# Altium PCB msb.PcbDoc
Units mm, origin at the board's own origin, x right, y up, seen from the top; angles counter-clockwise.
Board outline 60 x 40 mm, 4 copper layers (Top Layer, Power plane, Ground plane, Bottom Layer), stack 1.673 mm thick; 50 components, 51 nets, 251 pads, 118 vias.
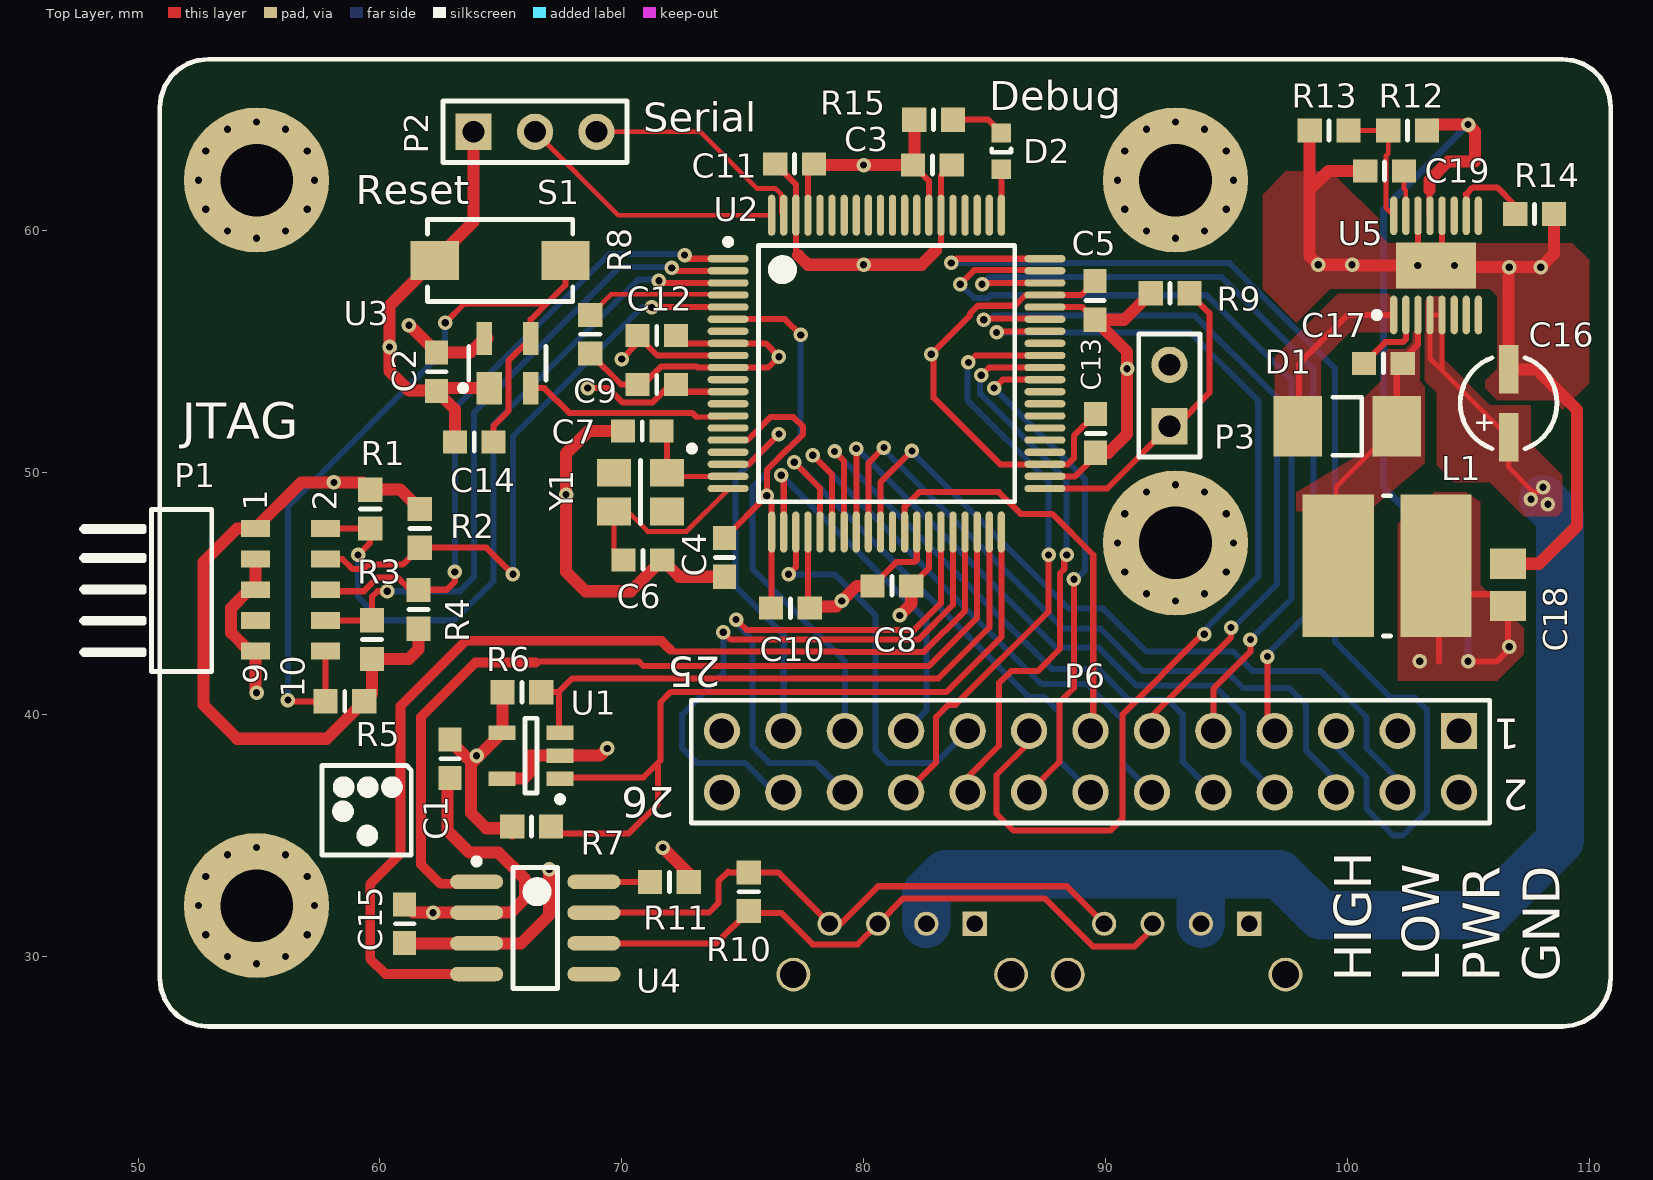
[diagram p0: Top Layer view]
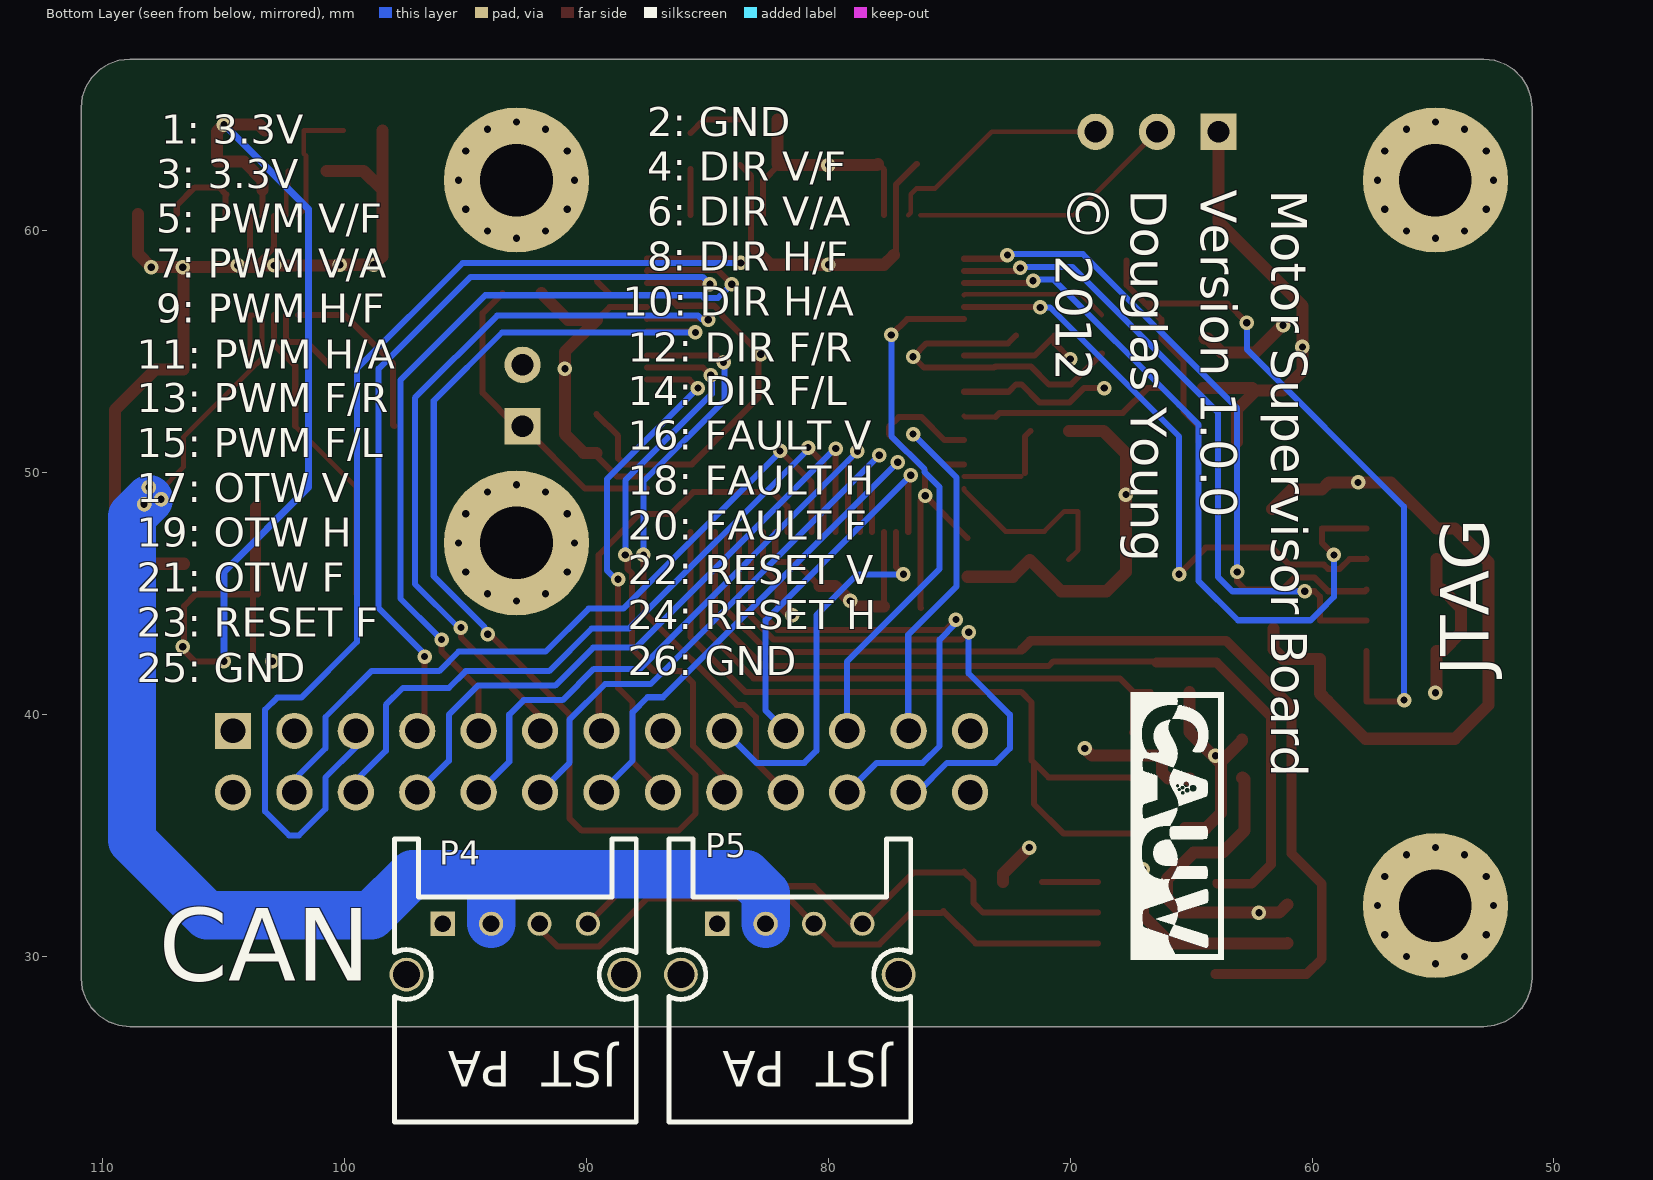
[diagram p1: Bottom Layer view, seen from below]
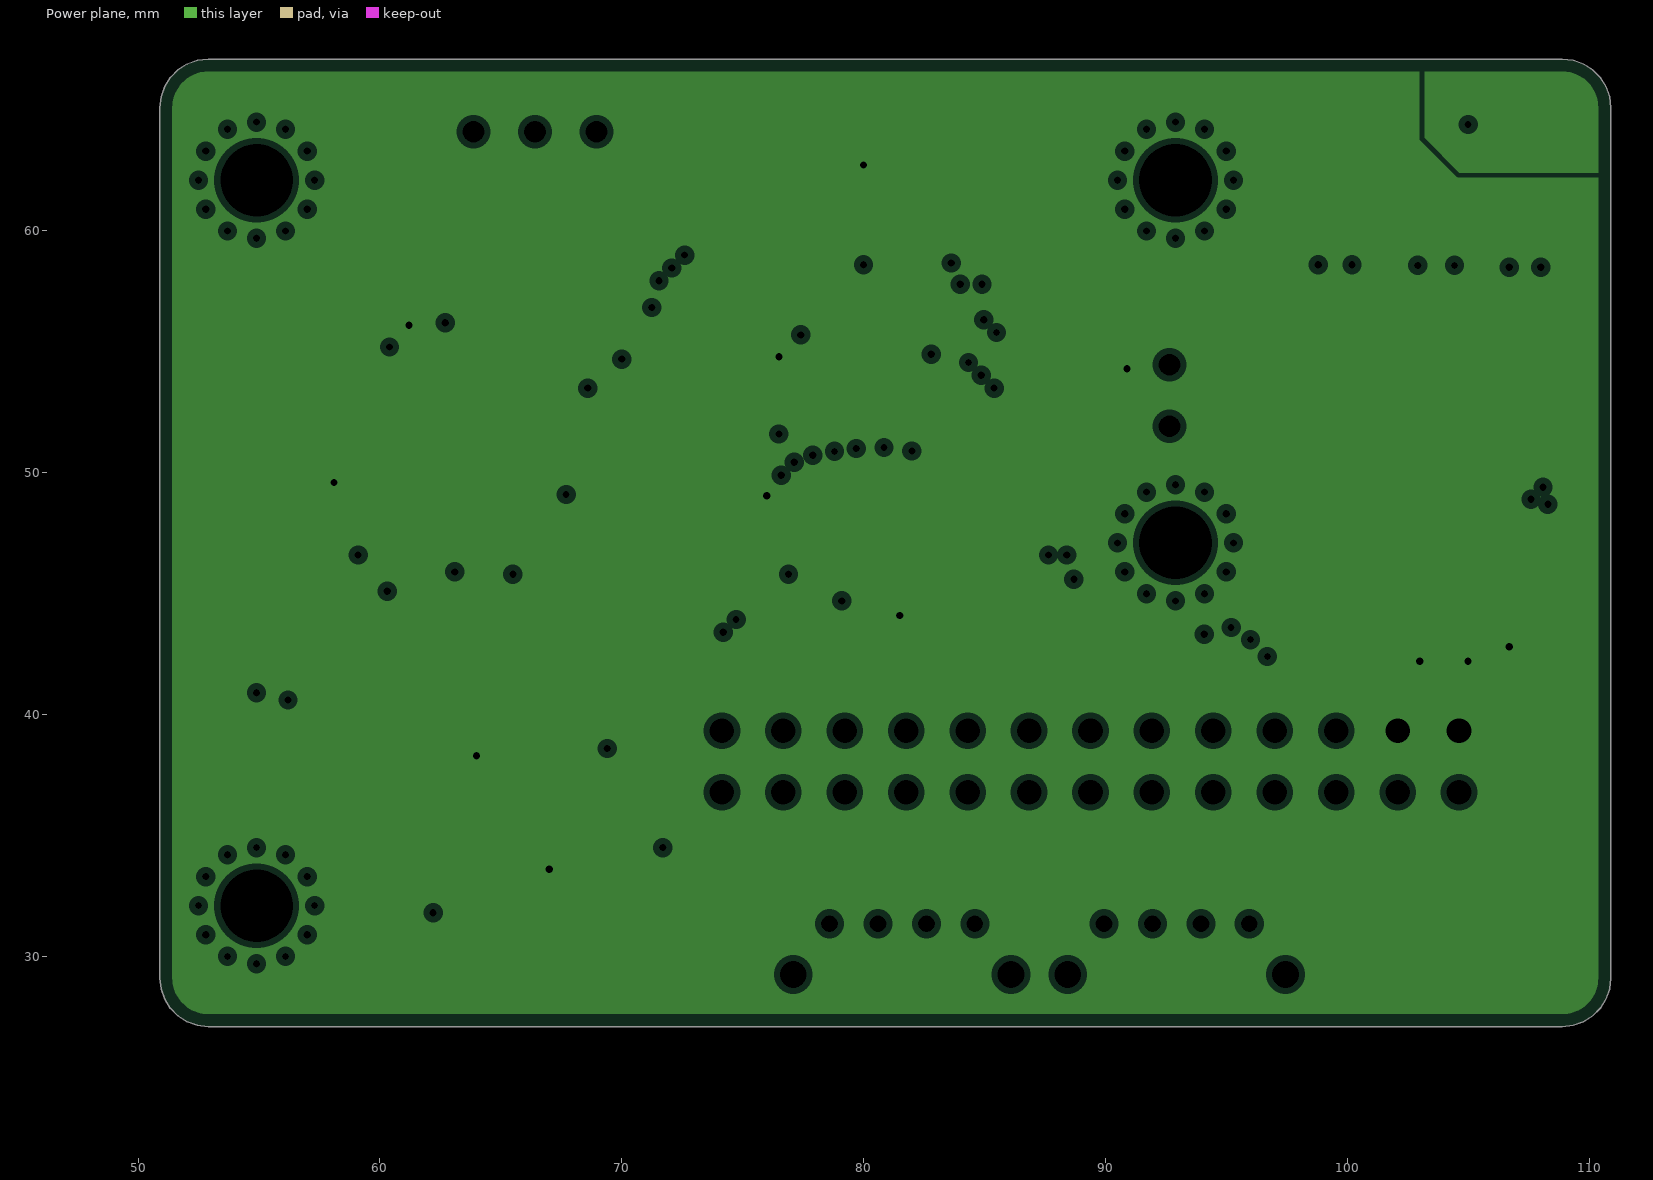
[diagram p2: Power plane, clearances drawn from the general rule]
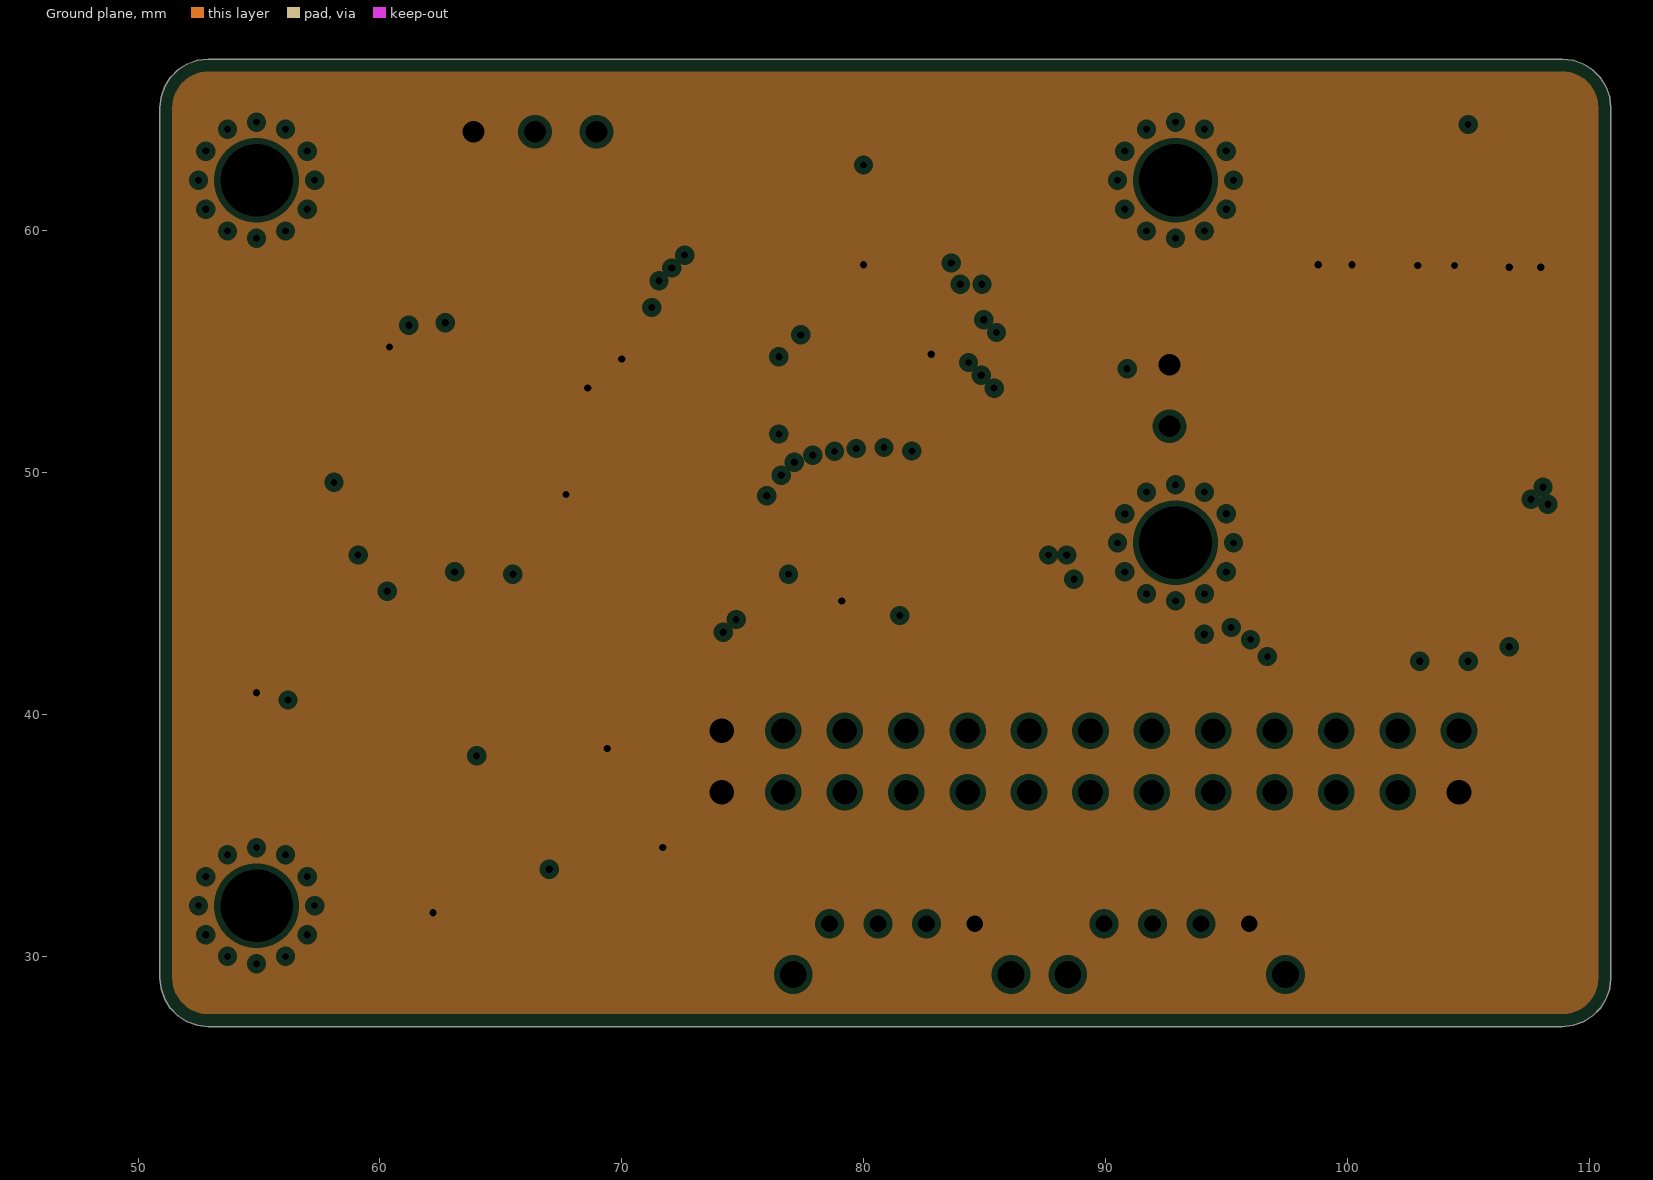
[diagram p3: Ground plane, clearances drawn from the general rule]

## Layer stack, top to bottom
Top Layer: signal copper 0.0356
Dielectric: core 0.22, FR-4, Dk 4.8
Power plane: plane copper 0.0356, net +3.3
Dielectric: prepreg 0.9906, FR-4, Dk 4.8
Ground plane: plane copper 0.0356, net GND
Dielectric: core 0.32, FR-4, Dk 4.8
Bottom Layer: signal copper 0.0356

## Board outline
108.9,27.1 52.9,27.1 52.455,27.15 52.032,27.298 51.653,27.536 51.336,27.853 51.098,28.232 50.95,28.655 50.9,29.1 50.9,65.1 50.95,65.545 51.098,65.968 51.336,66.347 51.653,66.664 52.032,66.902 52.455,67.05 52.9,67.1 108.9,67.1 109.345,67.05 109.768,66.902 110.147,66.664 110.464,66.347 110.702,65.968 110.85,65.545 110.9,65.1 110.9,29.1 110.85,28.655 110.702,28.232 110.464,27.853 110.147,27.536 109.768,27.298 109.345,27.15

## Design rules (kind name [scope] priority, off if disabled: settings)
AssemblyTestPointUsage [All] p1 off:
Clearance [All] p1: gap=0.15
ComponentClearance [All] p1: gap=0.25 collisioncheckmode=3 verticalgap=0.25 showdistances=FALSE
FabricationTestPointUsage [All] p1 off: valid=0 allowmultiple=FALSE
HoleSize [All] p1: absolutevalues=TRUE maxlimit=10 minlimit=0.2 maxpercent=80.000 minpercent=20.000
HoleToHoleClearance [All] p1: gap=0.25 allowstackedmicrovias=TRUE
MinimumAnnularRing [All] p1: minimumring=0.15
MinimumSolderMaskSliver [All] p1: minsoldermaskwidth=0.125
PlaneClearance [All] p1: clearance=0.25
PlaneConnect [All] p1: planeconnectstyle=Relief reliefexpansion=0.5 reliefentries=4 reliefconductorwidth=0.25 reliefairgap=0.25
PolygonConnect [All] p1: connectstyle=Direct reliefconductorwidth=0.25 reliefentries=4 polygonreliefangle="90 Angle"
RoutingVias [All] p1: holewidth=0.3 width=0.6 viastyle="Through Hole" minholewidth=0.3 minwidth=0.6 maxholewidth=0.4 maxwidth=0.8
SilkToSilkClearance [All] p1: silktosilkclearance=0.25
SilkscreenOverComponentPads [All] p1: minsilkscreentomaskgap=0.125
SolderMaskExpansion ViaCovering [(IsVia)] p1: expansion=-10
SolderMaskExpansion [All] p2: expansion=0.125
Width "CAN Power" [InNet('CAN_POWER')] p1: maxlimit=10 minlimit=0.2 preferedwidth=2
Width Power [InNetClass('Power')] p2: maxlimit=10 minlimit=0.25 preferedwidth=0.5
Width General [All] p3: maxlimit=10 minlimit=0.2 preferedwidth=0.25
18 further rules are at their usual default settings.

## Classes and differential pairs
net class Power: +3.3 CAN_POWER GND
component class "U_Reset Supervisor": C1.10 C2.10 C13 C14 U1.10 U3
component class U_motor_output: J? P6
component class U_mcu_power: C1.8 C2 C2.8 C3 C3.8 C4 C4.8 C5 C5.8 C6 C6.8 C7 C7.8 C8 C8.8 C9 C9.8 C10 C10.8 C11 C11.8 C12 P1.8 P3 R1.8 R2.8 R8 R9 S1 S1.8 Y1 Y1.8
component class "U_I2C 3": R1.6 R2.6 R6 R7
component class "U_ARM JTAG Header": P1 P1.2 R1 R1.2 R2 R2.2 R3 R3.2 R4 R4.2 R5 R5.2
component class "U_1KB I2C EEPROM": C1 C1.1 U1 U1.1
component class U_3: C16 C17 C18 C19 D1 L1 R12 R13 R14 U5
component class "U_CAN Termination Connector (JST)": P4 P5 R10
component class U_mcu: D2 P2 R15 U2

## Components (designator, comment, footprint, x,y, rotation, side; value= is the part's Value field where it differs from the comment)
C1 "Cap" C0603 62.9,38.175 r270 top
C2 "Cap" C0603 62.35,54.175 r270 top (schematic designator C1)
C3 "Cap" C0603 82.85,62.725 r0 top (schematic designator C2)
C4 "Cap" C0603 74.25,46.5 r270 top (schematic designator C3)
C5 "Cap" C0603 89.575,57.125 r90 top (schematic designator C4)
C6 "Cap" C0603 70.875,46.4 r0 top (schematic designator C5)
C7 "Cap" C0603 70.85,51.725 r180 top (schematic designator C6)
C8 "Cap" C0603 81.175,45.325 r180 top (schematic designator C7)
C9 "Cap" C0603 71.45,53.65 r0 top (schematic designator C8)
C10 "Cap" C0603 76.975,44.4 r0 top (schematic designator C9)
C11 "Cap" C0603 77.15,62.775 r180 top (schematic designator C10)
C12 "Cap" C0603 71.45,55.675 r180 top (schematic designator C11)
C13 "Cap" C0603 89.6,51.625 r90 top (schematic designator C1)
C14 "Cap" C0603 63.9,51.275 r180 top (schematic designator C2)
C15 "Cap" C0603 61.025,31.35 r90 top (schematic designator C1)
C16 "Cap Pol1" EEEHC1H2R2R 106.675,54.275 r180 top (schematic designator C1)
C17 "Cap" C0603 101.5,54.525 r180 top (schematic designator C2)
C18 "Cap" C0805 106.65,45.375 r90 top (schematic designator C4)
C19 "Cap" C0603 101.55,62.475 r180 top (schematic designator C6)
D1 "D Schottky" VS-10BQ030TRPBF 100,51.925 r0 top
D2 "" LGQ971 85.7,64.05 r270 top (schematic designator D1)
L1 "Inductor" SDR0604-150YL 101.65,46.15 r180 top
P1 "Header 5X2" FTSH-105-01-L-DH 47.45,41.975 r0 top
P2 "Header 3" HDR1X3 63.875,64.1 r0 top
P3 "Header 2" HDR1X2 92.65,51.925 r90 top (schematic designator P1)
P4 "Header 4" S04B-PASK-2 89.95,31.35 r0 bottom (schematic designator P1)
P5 "Header 4" S04B-PASK-2 78.6,31.35 r0 bottom (schematic designator P2)
P6 "Header 13X2" HDR2X13 104.625,39.325 r180 top (schematic designator P3)
R1 "Res" R0603 59.6,48.5 r90 top
R2 "Res" R0603 61.65,47.7 r90 top
R3 "Res" R0603 59.675,43.1 r270 top
R4 "Res" R0603 61.6,44.35 r270 top
R5 "Res" R0603 58.55,40.55 r0 top
R6 "Res" R0603 65.875,40.925 r180 top (schematic designator R1)
R7 "Res" R0603 66.275,35.375 r180 top (schematic designator R2)
R8 "Res" R0603 68.7,55.725 r270 top (schematic designator R1)
R9 "Res" R0603 92.675,57.425 r180 top (schematic designator R2)
R10 "Res2" R0603 75.25,32.675 r270 top (schematic designator R4)
R11 "Res" R0603 71.975,33.075 r180 top (schematic designator R5)
R12 "Res" R0603 102.5,64.15 r0 top (schematic designator R1)
R13 "Res" R0603 99.25,64.15 r0 top (schematic designator R3)
R14 "Res" R0603 107.75,60.7 r180 top (schematic designator R4)
R15 "Res" R0603 82.9,64.6 r180 top (schematic designator R3)
S1 "SW-PB" DTSM-32S-B 64.975,58.775 r0 top
U1 "24AA08T-I/OT" 24AA08T-I/OT 66.25,38.3 r180 top
U2 "LPC1758" LPC1758FBD80 80.95,54.1 r0 top (schematic designator U1)
U3 "STM811" STM811 65.275,54.525 r90 top (schematic designator U1)
U4 "SN65HVD230DR" SN65HVD230DR 66.425,31.175 r0 top (schematic designator U1)
U5 "LT3509" LT3509 103.675,58.575 r90 top (schematic designator U1)
Y1 "XTAL" C3E-24.000-12-3030-X 71.875,50 r180 top

## Footprints (in the part's own frame and the unit in brackets; to place one, negate y for a bottom-side part, rotate by r counter-clockwise, add the part's x,y. Pads: shape width x height; smd on the part's side, far side on the other; paste and mask are expansions set on the pad)
24AA08T-I/OT [mm] "MICROCHIP - 24AA08T-I/OT - EEPROM SERIAL 8KB, SMD, SOT-23-5"
  rect 1.1x0.6 smd mask+0.2: 1(-1.2,0.95) 2(-1.2,0) 3(-1.2,-0.95)
  rect 1.1x0.6 smd: 4(1.2,-0.95) 5(1.2,0.95)
  silkscreen extent -1.33,-1.55 0.25,1.92, body extent -0.87,-1.55 0.87,1.55, height 1.45
C3E-24.000-12-3030-X [mm] "Crystal, Thru-Hole; 2 Leads; Body 3.1 x 8.2 mm (Dia.xH)"
  rect 1.4x1.15 smd: 1(0,0) 2(2.2,1.6) 3(2.2,0) 4(0,1.6)
  silkscreen extent -1.15,-1.12 1.1,2.1, body extent -0.6,-0.5 2.8,2.1, height 0.75
C0603 [mm] "Chip Capacitor, 2-Leads, Body 1.6x0.8mm, IPC Medium Density"
  rect 1x0.95 smd: 1(-0.8,0) 2(0.8,0)
  silkscreen extent 0,-0.38 0,0.38, body extent -0.88,-0.48 0.87,0.48, height 0.8
C0805 [mm] "KEMET - C0805C104K5RACTU - CAPACITOR, 0805, 100NF, 50V, X7R"
  rect 1.25x1.5 smd: 1(-0.889,0) 2(0.861,0)
  body extent -1.12,-0.72 1.09,0.72, height 1
DTSM-32S-B [mm] "MULTICOMP - DTSM-32S-B - TACTILE SWITCH, SPNO, SMD, 50MA"
  rect 2x1.6 smd: 1(-2.7,0) 2(2.7,0)
  silkscreen extent -3,-1.7 3,1.7, body extent -3.67,-1.75 3.67,1.75, height 2.08
EEEHC1H2R2R [mm] "PANASONIC - EEEHC1H2R2R - CAPACITOR, ELECTROLYTIC, 50V, 2.2UF"
  rect 0.8x2 smd: 1(0,2.8) 2(0,0)
  silkscreen extent -2,-0.48 2,3.28, body extent -2.15,-0.9 2.15,3.7, height 5.9
FTSH-105-01-L-DH [mm] "HEADER, 1.27MM, R/A, SMD, 10WAY"
  rect 1.2x0.7 smd: 1(7.4,5.725) 2(10.3,5.725) 3(7.4,4.456) 4(10.3,4.456) 5(7.4,3.187) 6(10.3,3.187) 7(7.4,1.919) 8(10.3,1.919) 9(7.4,0.65) 10(10.3,0.65)
  silkscreen extent 0.2,-0.2 5.6,6.5, body extent 0,0 10.77,6.35, height 3.43
HDR1X2 [mm] "Connector; Header; 2 Position"
  rect 1.5x1.5 hole 0.9: 1(0,0)
  round 1.5 hole 0.9: 2(2.54,0)
  silkscreen extent -1.27,-1.27 3.81,1.27
HDR1X3 [mm] "Connector; Header; 3 Position"
  rect 1.5x1.5 hole 0.9: 1(0,0)
  round 1.5 hole 0.9: 2(2.54,0) 3(5.08,0)
  silkscreen extent -1.27,-1.27 6.35,1.27
HDR2X13 [mm] "Connector; Header; 13x2 Position"
  rect 1.5x1.5 hole 1.016: 1(0,0)
  round 1.5 hole 1.016: 2(0,2.54) 3(2.54,0) 4(2.54,2.54) 5(5.08,0) 6(5.08,2.54) 7(7.62,0) 8(7.62,2.54) 9(10.16,0) 10(10.16,2.54) 11(12.7,0) 12(12.7,2.54) 13(15.24,0) 14(15.24,2.54) 15(17.78,0) 16(17.78,2.54) 17(20.32,0) 18(20.32,2.54) 19(22.86,0) 20(22.86,2.54) 21(25.4,0) 22(25.4,2.54) 23(27.94,0) 24(27.94,2.54) 25(30.48,0) 26(30.48,2.54)
  silkscreen extent -1.27,-1.27 31.75,3.81
LGQ971 [mm] "OSRAM - LGQ971 - LED, SMD, GREEN"
  rect 0.8x0.8 smd: 1(0,0) 2(1.5,0)
  silkscreen extent 0.65,-0.4 0.8,0.4, body extent 0.02,-0.4 1.42,0.4, height 0.9
LPC1758FBD80 [mm] "LPC1758FBD80"
  oval 1.7x0.3 smd: 1(-6.55,4.75) 2(-6.55,4.25) 3(-6.55,3.75) 4(-6.55,3.25) 5(-6.55,2.75) 6(-6.55,2.25) 7(-6.55,1.75) 8(-6.55,1.25) 9(-6.55,0.75) 10(-6.55,0.25) 11(-6.55,-0.25) 12(-6.55,-0.75) 13(-6.55,-1.25) 14(-6.55,-1.75) 15(-6.55,-2.25) 16(-6.55,-2.75) 17(-6.55,-3.25) 18(-6.55,-3.75) 19(-6.55,-4.25) 20(-6.55,-4.75) 41(6.55,-4.75) 42(6.55,-4.25) 43(6.55,-3.75) 44(6.55,-3.25) 45(6.55,-2.75) 46(6.55,-2.25) 47(6.55,-1.75) 48(6.55,-1.25) 49(6.55,-0.75) 50(6.55,-0.25) 51(6.55,0.25) 52(6.55,0.75) 53(6.55,1.25) 54(6.55,1.75) 55(6.55,2.25) 56(6.55,2.75) 57(6.55,3.25) 58(6.55,3.75) 59(6.55,4.25) 60(6.55,4.75)
  oval 0.3x1.7 smd: 21(-4.75,-6.55) 22(-4.25,-6.55) 23(-3.75,-6.55) 24(-3.25,-6.55) 25(-2.75,-6.55) 26(-2.25,-6.55) 27(-1.75,-6.55) 28(-1.25,-6.55) 29(-0.75,-6.55) 30(-0.25,-6.55) 31(0.25,-6.55) 32(0.75,-6.55) 33(1.25,-6.55) 34(1.75,-6.55) 35(2.25,-6.55) 36(2.75,-6.55) 37(3.25,-6.55) 38(3.75,-6.55) 39(4.25,-6.55) 40(4.75,-6.55) 61(4.75,6.55) 62(4.25,6.55) 63(3.75,6.55) 64(3.25,6.55) 65(2.75,6.55) 66(2.25,6.55) 67(1.75,6.55) 68(1.25,6.55) 69(0.75,6.55) 70(0.25,6.55) 71(-0.25,6.55) 72(-0.75,6.55) 73(-1.25,6.55) 74(-1.75,6.55) 75(-2.25,6.55) 76(-2.75,6.55) 77(-3.25,6.55) 78(-3.75,6.55) 79(-4.25,6.55) 80(-4.75,6.55)
  silkscreen extent -6.67,-5.3 5.3,5.57, body extent -6,-6 6,6, height 1.6
LT3509 [mm] "LT3509"
  oval 1.6x0.3 smd mask+0.2: 1(-2.05,1.75) 2(-2.05,1.25) 3(-2.05,0.75) 4(-2.05,0.25) 5(-2.05,-0.25) 6(-2.05,-0.75) 7(-2.05,-1.25) 8(-2.05,-1.75) 9(2.05,-1.75) 10(2.05,-1.25) 11(2.05,-0.75) 12(2.05,-0.25) 13(2.05,0.25) 14(2.05,0.75) 15(2.05,1.25) 16(2.05,1.75)
  rect 1.9x3.3 smd mask+0.2: 17(0,0)
  silkscreen extent -2.17,2.32 -1.93,2.57, body extent -1.55,-2.07 1.55,2.07, height 1.1
R0603 [mm]
  rect 1x1 smd: 1(-0.8,0) 2(0.8,0)
  silkscreen extent 0,-0.4 0,0.4, body extent -0.85,-0.48 0.85,0.47, height 0.45
S04B-PASK-2 [mm] "JST (JAPAN SOLDERLESS TERMINALS) - S04B-PASK-2 - HEADER, PA, 4WAY, SIDE, 2MM"
  rect 1x1 hole 0.7: 1(6,0)
  round 1 hole 0.7: 2(4,0) 3(2,0) 4(0,0)
  round 1.4 hole 1.1: ""(-1.5,2.1) ""(7.5,2.1)
  silkscreen extent -2,-3.5 8,8.2, body extent -2,-3.5 8,8.2, height 6.5
SDR0604-150YL [mm] "BOURNS - SDR0604-150YL - INDUCTOR, SMD, 15UH, 1.6A"
  rect 2.95x5.9 smd: 1(-2.025,0) 2(2.025,0)
  silkscreen extent -0.15,-2.9 0.15,2.9, body extent -2.9,-2.88 2.9,2.92, height 4.8
SN65HVD230DR [mm] "TEXAS INSTRUMENTS - SN65HVD230DR - TRANSCEIVER CAN, 65HVD230, SOIC8"
  oval 2.2x0.6 smd: 1(-2.425,1.905) 2(-2.425,0.635) 3(-2.425,-0.635) 4(-2.425,-1.905) 5(2.425,-1.905) 6(2.425,-0.635) 7(2.425,0.635) 8(2.425,1.905)
  silkscreen extent -2.55,-2.5 0.93,2.88, body extent -2,-2.5 2,2.5, height 1.75
STM811 [mm] "SOT143, 4-Leads, Body 3.0x2.6mm (max), Pitch 1.92mm, IPC Medium Density"
  rect 1.35x1.05 smd: 1(-1.025,0.76)
  rect 1.35x0.65 smd: 2(-1.025,-0.96) 3(1.025,-0.96) 4(1.025,0.96)
  silkscreen extent -1.15,-1.6 0.7,1.96, body extent -0.7,-1.52 0.7,1.52, height 1.12
VS-10BQ030TRPBF [mm] "VISHAY FORMERLY I.R. - VS-10BQ030TRPBF - DIODE, SCHOTTKY, 1A, 30V"
  rect 2x2.5 smd: 1(-2.05,0) 2(2.05,0)
  silkscreen extent -0.6,-1.2 0.6,1.2, body extent -2.2,-1.8 2.2,1.8, height 2.4

## Part data
C1 C2 C3 C4 C5 C6 C7 C8 C9 C10 C11 C12 C13 C14 C15 C17 C18 C19: "Capacitor"
C16: "Polarized Capacitor (Radial)"
D1: "Schottky Diode"
D2: library part LED2, "Typical RED, GREEN, YELLOW, AMBER GaAs LED"
P1: "Header, 5-Pin, Dual row"
P2: "Header, 3-Pin"
P3: "Header, 2-Pin"
P4 P5: "Header, 4-Pin"
P6: "Header, 13-Pin, Dual row"
R1 R2 R3 R4 R5 R6 R7 R8 R9 R11 R12 R13 R14 R15: library part Res2, "Resistor"
R10: "Resistor"
S1: "Switch"
U1: "MICROCHIP - 24AA08T-I/OT - EEPROM SERIAL 8KB, SMD, SOT-23-5"
U2: "NXP - LPC1758FBD80 - MCU, 32BIT, ARM CORTEX M3, 80LQFP"
U3: "STMICROELECTRONICS - STM811TW16F - MPU LOW RESET 3.08V, SOT-143-4, 811"
U4: "TEXAS INSTRUMENTS - SN65HVD230DR - TRANSCEIVER CAN, 65HVD230, SOIC8"
Y1: "Crystal Oscillator"

## Free pads (board coordinates)
  round 6 hole 3: 1(54.9,32.1) 1(54.9,62.1) 1(92.9,47.1) 1(92.9,62.1)

## Via types
v1: diameter 0.6, hole 0.3, Top Layer to Bottom Layer, 68 vias
v2: diameter 0.6, hole 0.3, Top Layer to Bottom Layer, tented both sides, 48 vias
v3: diameter 0.6, hole 0.3, Top Layer to Bottom Layer, tented top, 2 vias

## Nets (pads, with @x,y where several pads share a name; then routed paths per layer and width w, separated by ;. In a path a pad name is that pad's centre, name@x,y a point inside that pad or via, vN(x,y) a via of type N, cw(c..) or ccw(c..) an arc to the next point about the centre after c; other vN are vias at no path point)
+3.3: C1.1 C2.1 C3.1 C4.1 C5.1 C8.1 C9.1 C10.1 C11.1 C12.1 C13.1 C15.1 C18.1 L1.1 P1.1 P6.1 P6.3 R1.2 R2.2 R3.2 R4.2 R5.2 R6.2 R7.2 R8.2 R9.2 R12.2 R15.2 U1.4 U2.8 U2.10 U2.16 U2.21 U2.34 U2.42 U2.56 U2.67 U2.77 U3.4 U4.3 U5.13 | length 160.5
  Top Layer w0.25: R8.2 69.975,53.65 C9.1 70.886,53.65 71.636,54.4 73.1,54.4 73.15,54.35 U2.10 76.05,54.35 v1(76.5,54.8) 75.95,55.35 U2.8 72.575,55.35 C12.1 ; C4.1 v1(76,49.05) ; U2.16 75.201,51.35 76.151,52.3 77.1,52.3 77.5,51.9 77.5,51.6 76.905,51.005 76.892,51.005 76,50.113 v1(76,49.05) ; C10.1 76.2,44.425 U2.21 76.2,48.85 v1(76,49.05) ; U2.77 77.7,62.525 C11.1 ; C8.1 82.7,46.05 U2.34 ; C3.1@81.975,62.8 C3.1 82.7,62.075 U2.67 ; U2.42 88.75,49.85 89.6,50.7 C13.1 ; U2.56 89.05,56.85 C5.1 ; 103.4,61.7 103.4,60.65 U5.13 ; 103.8,42.2 103.8,48.6 103.6,48.8 103.6,44.975 106.161,44.975 C18.1 106.65,42.85 v1(106.7,42.8) 106.7,42.7 106.2,42.2 v1(105,42.2)
  Top Layer w0.5: v1@58.275,49.6 v1(58.1,49.6) ; C15.1 61.035,30.54 U4.3 ; v1(61.2,56.1) 61.225,56.1 C2.1 63.74,54.975 U3.4 U3.4@64.45,55.55 ; R4.2 61.6,42.7 61.2,42.3 R3.2 59.675,40.875 R5.2 57.8,39 54.1,39 52.7,40.4 52.7,46.3 54.1,47.7 P1.1 56.75,49.6 v1(58.1,49.6) ; R2.2 60.85,49.3 R1.2 59.3,49.6 v1(58.1,49.6) ; C1.1 62.9,38.916 63.775,38.041 ; U4.3@64.94,30.54 U4.3 ; R6.2 65.075,39.275 U1.4 63.841,38.041 63.775,38.041 ; R7.2@65.475,35.075 65.25,35.3 64.4,35.3 63.775,35.925 63.775,38.041 ; v1(67,33.6) 67,31.7 65.84,30.54 U4.3 ; C11.1 78,62.725 C3.1 ; v1(80,62.725) C3.1 ; v1(81.5,44.1) 81.975,44.575 C8.1 ; R15.2 82.1,62.775 C3.1 ; C13.1 90.125,50.825 90.9,51.6 v1(90.9,54.3) 90.9,55 C5.1 90.775,56.325 R9.2 ; R12.2 103.55,64.4 v1(105,64.4) 105.286,64.114 105.286,62.875 104.175,62.875 103.4,62.1 103.4,61.7
  Bottom Layer w0.3: v1(105,42.2) 105,45.9 101.5,49.4 101.5,60.9 v1(105,64.4)
  other v1: 64,38.3 103,42.2
B\R\D\_\R\E\S\E\T\: C14.1 P1.10 R5.1 S1.2 U3.3 | length 35.2
  Top Layer w0.25: v1(56.2,40.6) 56.25,40.55 R5.1 P1.10 ; v1(62.7,56.2) 63.5,57 66.9,57 ; C14.1 64.7,51.935 65.315,52.55 65.315,54.63 U3.3 66.235,56.335 66.9,57 ; S1.2 67.675,57.775 66.9,57
  Bottom Layer w0.25: v1(56.2,40.6) 56.2,48.6 62.7,55.1 v1(62.7,56.2)
CAN.CAN_N: P4.3 P5.3 R10.2 U4.6 | length 26.3
  Top Layer w0.25: U4.6 73.915,30.54 R10.2 75.325,31.8 76.6,31.8 77.9,30.5 79.75,30.5 P5.3 81.65,32.4 87.5,32.4 89.5,30.4 91.2,30.4 91.95,31.15 P4.3
CAN.CAN_P: P4.4 P5.4 R10.1 U4.7 | length 24.5
  Top Layer w0.25: U4.7 73.61,31.81 74,32.2 74,33.1 74.4,33.5 74.425,33.475 R10.1 76.475,33.475 P5.4 79.05,31.35 80.6,32.9 88.4,32.9 P4.4
CAN_POWER: C16.1 P4.2 P5.2 U5.4 U5.5 | length 58.5
  Top Layer w0.2: v1(108.1,49.4) 107.9,49.2 107.7,49.2 106.675,50.225 C16.1 103.925,54.225 ; 103.925,54.225 U5.5 U5.4 103.425,54.725 103.925,54.225
  Bottom Layer w2: P5.2 82.6,32.6 83.4,33.4 97.2,33.4 98.9,31.7 105.7,31.7 108.8,34.8 108.8,48.2 v1@108.1,48.9 ; P4.2 93.95,33.35
  other v1: 108.3,48.7 107.6,48.9
CAN_TTL.RXD: U2.37 U4.4 | length 44.2
  Top Layer w0.25: 72,42.6 72.4,42.6 78.926,42.6 78.932,42.595 82.495,42.595 84.2,44.3 U2.37
  Top Layer w0.4: U4.4 60.23,29.27 59.6,29.9 59.6,33 60.854,34.254 60.854,40.354 63.55,43.05 71.65,43.05 72,42.7
CAN_TTL.TXD: U2.38 U4.1 | length 37.2
  Top Layer w0.25: U4.1@63.92,33 U4.1 ; U2.38 84.7,44 82.7,42 70.9,42 70.7,42.2 66.5,42.2 ; 66.5,42.2 66.45,42.15 66.5,42.2
  Top Layer w0.4: U4.1@63.92,33 62.5,33 61.7,33.8 61.7,39.9 63.95,42.15 66.45,42.15
DIR.FWD_LEFT: P6.14 U2.25 | length 22.4
  Top Layer w0.25: v1(77.13,50.43) 78.2,49.361 U2.25
  Bottom Layer w0.25: v1(77.13,50.43) 86.845,40.716 87.484,40.716 88.1,40.1 88.1,38.1 89.385,36.815 P6.14
DIR.FWD_RIGHT: P6.12 U2.26 | length 24.4
  Top Layer w0.25: v1(77.9,50.721) 78.7,49.921 U2.26
  Bottom Layer w0.25: v1(77.9,50.721) 87.361,41.261 ; 87.449,41.261 87.361,41.261 ; P6.12 90.7,38.01 90.7,39.8 89.239,41.261 87.361,41.261
DIR.HORZ_AFT: P6.10 U2.27 | length 26.1
  Top Layer w0.25: v1(78.8,50.882) 79.2,50.482 U2.27
  Bottom Layer w0.25: v1(78.8,50.882) 87.791,41.891 89.7,41.891 90.991,40.6 92.6,40.6 93.2,40 93.2,38.05 P6.10
DIR.HORZ_FORE: P6.8 U2.28 | length 27.9
  Top Layer w0.25: U2.28 v1(79.7,51)
  Bottom Layer w0.25: v1(79.7,51) 79.743,51 87.971,42.771 89.5,42.771 89.729,42.771 91.3,41.2 94.5,41.2 95.7,40 95.7,38.09 P6.8 P6.8@97.005,36.895
DIR.VERT_AFT: P6.6 U2.29 | length 29.8
  Top Layer w0.25: U2.29 80.2,50.4 v1(80.843,51.043)
  Bottom Layer w0.25: v1(80.843,51.043) 80.843,50.96 88.252,43.552 89.8,43.552 91.552,41.8 95,41.8 95.7,41.1 97.6,41.1 98.3,40.4 98.3,38.5 99.545,37.255 P6.6
DIR.VERT_FORE: P6.4 U2.30 | length 30.9
  Top Layer w0.25: U2.30 80.7,49.6 v1(82,50.9)
  Bottom Layer w0.25: v1(82,50.9) 82,50.864 88.482,44.382 89.918,44.382 91.7,42.6 95.3,42.6 96.1,41.8 98.9,41.8 100.8,39.9 100.8,38.6 102.085,37.315 P6.4
FAULT.FWD: P6.20 U2.52 | length 25.1
  Top Layer w0.25: P6.20 83,38.02 83,39.9 83.5,40.4 83.8,40.4 87.65,44.25 v1(87.65,46.6) v1@87.65,46.537 ; v1(84.339,54.561) 84.629,54.85 U2.52
  Bottom Layer w0.25: v1(84.339,54.561) 84.295,54.516 84.295,53.005 87.65,49.65 v1(87.65,46.6)
FAULT.HORZ: P6.18 U2.51 | length 23.8
  Top Layer w0.25: P6.18 84.305,37.405 85.6,38.7 85.6,41.3 86.1,41.8 87.2,41.8 88.125,42.725 88.125,45.838 88.3,46.013 88.3,46.5 v1(88.4,46.6) ; v1(84.87,54.03) 85.189,54.35 U2.51
  Bottom Layer w0.25: v1(84.87,54.03) 84.825,53.986 84.825,53.262 88.4,49.687 v1(88.4,46.6)
FAULT.VERT: P6.16 U2.50 | length 21.5
  Top Layer w0.25: v1(85.4,53.5) 85.75,53.85 U2.50 ; P6.16 88.1,38.04 88.1,40.5 88.7,41.1 v1(88.7,45.6)
  Bottom Layer w0.25: v1(85.4,53.5) 89.15,49.75 89.15,45.95 88.8,45.6 v1(88.7,45.6)
GND: C1.2 C2.2 C3.2 C4.2 C5.2 C6.2 C7.2 C8.2 C9.2 C10.2 C11.2 C12.2 C13.2 C14.2 C15.2 C16.2 C18.2 C19.2 P1.3 P1.5 P1.9 P2.1 P3.2 P4.1 P5.1 P6.2 P6.25 P6.26 R11.1 R13.1 R14.1 S1.1 U1.2 U1.5 U2.9 U2.12 U2.24 U2.33 U2.43 U2.57 U2.66 U2.78 U3.1 U4.2 U5.12 U5.14 U5.17 | length 156
  Top Layer w0.25: v1(68.6,53.5) 69.436,53.5 70.036,52.9 71.264,52.9 72.014,53.65 C9.2 72.55,53.35 U2.12 ; v1(70,54.7) 70.65,55.35 C12.2 71.475,54.85 U2.9 ; C11.2 77.2,61.925 U2.78 77.2,59.1 77.3,59 ; U2.24 77.7,44.475 C10.2 ; C8.2 81.35,46.3 82.1,46.3 82.2,46.4 U2.33 ; 83,59.2 83.2,59.4 U2.66 83.2,62.275 C3.2 ; U2.43@88.325,50.35 U2.43 ; C5.2 89,57.35 U2.57 86.699,57.35 86.254,56.905 84.731,56.905 84.395,56.569 84.395,56.495 v1(82.8,54.9) 82.9,54.8 82.9,53.1 85.65,50.35 U2.43 ; C13.2 88.7,51.525 88.7,50.6 88.45,50.35 U2.43 ; U5.14 102.925,59.325 U5.17 103.925,58.825 U5.12
  Top Layer w0.5: P1.3 P1.5 54.603,45.162 53.85,44.409 53.85,43.378 54.603,42.625 P1.9 54.85,40.95 v1(54.9,40.9) ; C15.2 61.365,31.81 U4.2 65.41,31.81 66,32.4 66,33.2 64.9,34.3 63.7,34.3 62.8,35.2 62.8,37.325 62.875,37.4 C1.2 ; C14.2 63.1,52.625 C2.2 ; P2.1 63.875,60.375 S1.1 60.4,56.9 v1(60.4,55.2) 60.4,54.2 61.2,53.4 62.325,53.4 C2.2 ; U3.1 62.475,53.5 C2.2 ; U1.5@65.1,37.3 U1.5 65.95,37.35 66.2,37.6 66.2,38.3 U1.2 69.1,38.3 v1(69.4,38.6) ; C7.2 68.625,51.725 67.7,50.8 v1(67.7,49.1) 67.7,45.9 68.5,45.1 70.375,45.1 C6.2 72.375,45.7 C4.2 ; v1(71.7,34.5) 72.775,33.425 R11.1 ; 77.3,59 77.7,58.6 v1(80,58.6) 82.4,58.6 83,59.2 ; C10.2@77.7,44.475 78.875,44.475 v1(79.1,44.7) 79.725,45.325 C8.2 ; R13.1 98.45,61.7 ; C19.2 99.225,62.475 98.45,61.7 ; C18.2 107.936,46.236 109.5,47.8 109.5,52.6 107.825,54.275 C16.2 106.675,58.475 v1(106.7,58.5) ; R14.1 108.55,59.05 v1(108,58.5) v1(106.7,58.5) ; 98.45,61.7 98.45,58.95 v1(98.8,58.6) v1(100.2,58.6) 100.225,58.575 U5.17 103.75,58.5 v1(106.7,58.5)
  other v1: 62.2,31.81
  other v3: 102.913,58.575 104.437,58.575
I2C.SCL: R7.1 U1.1 U2.40 | length 33.7
  Top Layer w0.25: U1.1 67.5,37.4 70.9,37.4 71.5,38 ; 67.675,35.075 67.075,35.075 70.275,35.075 71.5,36.3 71.5,38 ; U2.40 85.7,43.2 83.435,40.935 72.035,40.935 71.6,40.5 71.6,38.1 71.5,38
I2C.SDA: R6.1 U1.3 U2.39 | length 25.3
  Top Layer w0.25: R6.1 67.375,40.925 ; U1.3 67.4,39.3 67.4,40.9 67.375,40.925 ; U2.39 85.2,43.6 83.1,41.5 67.95,41.5 67.375,40.925
I\S\P\_\E\N\: P3.1 R9.1 U2.41 | length 12.9
  Top Layer w0.25: U2.41 90.075,49.35 P3.1 92.925,51.925 94.3,53.3 94.3,56.6 R9.1
NetC6_1: C6.1 U2.20 Y1.2 | length 8
  Top Layer w0.2: C6.1 69.675,46.8 Y1.2 70.246,48.4 71.071,47.575 72.679,47.575 74.4,49.296 U2.20
NetC7_1: C7.1 U2.19 Y1.1 | length 4.2
  Top Layer w0.2: Y1.1@72.025,49.85 U2.19
  Top Layer w0.25: C7.1 71.875,51.5 Y1.1
NetC17_1: C17.1 D1.2 L1.2 U5.3 | length 12.9
  Top Layer w0.2: L1.2@99.55,44.975 99.55,49.425 D1.2
  Top Layer w0.25: D1.2 102.05,54.425 102.325,54.7 102.925,55.3 U5.3
NetC17_2: C17.2 U5.2 | length 3.1
  Top Layer w0.25: C17.2 101.575,55.4 102.3,55.4 102.425,55.525 U5.2
NetC19_1: C19.1 U5.15 | length 1.9
  Top Layer w0.2: C19.1 102.35,61.75 102.425,61.675 U5.15
NetD1_1: D1.1 U5.1 | length 7.4
  Top Layer w0.25: D1.1 98,51.975 98,54.5 100.025,56.525 U5.1
NetD2_1: D2.1 R15.1 | length 2.2
  Top Layer w0.25: R15.1 85.15,64.6 D2.1
NetD2_2: D2.2 U2.61 | length 1.9
  Top Layer w0.25: U2.61 D2.2
NetP2_2: P2.2 U2.80 | length 11.2
  Top Layer w0.2: P2.2 69.865,60.65 U2.80
NetP2_3: P2.3 U2.79 | length 9.6
  Top Layer w0.2: P2.3 73.25,64.1 75.6,61.75 76.366,61.75 76.6,61.516 76.6,60.75 U2.79
NetR8_1: R8.1 U2.4 | length 6.1
  Top Layer w0.2: R8.1 69.559,57.384 74.366,57.384 U2.4
NetR11_2: R11.2 U4.8 | length 2.3
  Top Layer w0.25: U4.8 68.855,33.075 R11.2
NetR12_1: R12.1 R13.2 U5.16 | length 5.3
  Top Layer w0.2: R13.2 R12.1 ; R12.1@101.7,64.125 101.7,63.2 101.6,63.1 101.6,60.95 U5.16
NetR14_2: R14.2 U5.10 | length 3.7
  Top Layer w0.25: U5.10 104.925,61.475 104.9,61.5 105.2,61.8 106.2,61.8 106.95,61.05 R14.2
OTW.FWD: P6.21 U2.6 | length 22.1
  Top Layer w0.25: U2.6 76.75,56.35 v1(77.4,55.7)
  Bottom Layer w0.25: v1(77.4,55.7) 77.4,51.513 76.025,50.138 76.025,50.025 75.4,49.4 75.4,46.025 79.225,42.2 79.225,40.775 P6.21
OTW.HORZ: P6.19 U2.22 | length 15.8
  Top Layer w0.25: v1(76.6,49.9) 76.7,49.8 U2.22
  Bottom Layer w0.25: v1(76.6,49.9) 82.6,43.9 82.6,40.16 P6.19
OTW.VERT: P6.17 U2.23 | length 16.3
  Top Layer w0.25: v1(76.9,45.8) 77.2,46.1 U2.23
  Bottom Layer w0.25: v1(76.9,45.8) 78.813,45.8 80.5,44.113 80.5,38.5 81,38 82.98,38 P6.17
PWM.FWD_LEFT: P6.15 U2.54 | length 43.5
  Top Layer w0.25: v1(85.5,55.8) 85.55,55.85 U2.54 ; P6.15 86.845,38.845 85.5,37.5 85.5,35.9 86.2,35.2 90.2,35.2 90.7,35.7 90.7,40 94.076,43.376 94.124,43.376 94.124,43.363 v1(94.086,43.326)
  Bottom Layer w0.25: v1(85.5,55.8) 93.5,55.8 96.322,52.978 96.322,45.722 94.226,43.626 94.226,43.326 v1(94.086,43.326)
PWM.FWD_RIGHT: P6.13 U2.32 | length 17.5
  Top Layer w0.25: U2.32 81.7,48.6 82.3,49.2 85.6,49.2 86.5,48.3 87.8,48.3 89.5,46.6 89.5,39.44 P6.13
PWM.HORZ_AFT: P6.11 U2.55 | length 32.1
  Top Layer w0.25: v1(84.97,56.33) 85.014,56.375 87.475,56.375 U2.55 ; P6.11 91.925,39.925 95.2,43.2 v1(95.2,43.6)
  Bottom Layer w0.25: v1(84.97,56.33) 85.217,56.33 85.387,56.5 93.7,56.5 97.1,53.1 97.1,45.4 95.3,43.6 v1(95.2,43.6)
PWM.HORZ_FORE: P6.9 U2.59 | length 34.8
  Top Layer w0.25: v1(84,57.8) 84.575,58.375 87.475,58.375 U2.59 ; P6.9 94.465,41.065 96,42.6 v1(96,43.1)
  Bottom Layer w0.25: v1(84,57.8) 84.575,57.225 85.138,57.225 85.253,57.339 94.192,57.339 97.7,53.831 97.7,44.8 v1@96.2,43.3
PWM.VERT_AFT: P6.7 U2.58 | length 33.9
  Top Layer w0.25: v1(84.9,57.8) 84.95,57.85 U2.58 ; v1(96.7,42.4) 96.7,39.63 P6.7
  Bottom Layer w0.25: v1(84.9,57.8) 85.2,58.1 85.6,58.1 94.8,58.1 98.6,54.3 98.6,44.4 96.7,42.5 v1(96.7,42.4)
PWM.VERT_FORE: P6.5 U2.60 | length 49.2
  Top Layer w0.25: v1(83.625,58.675) 83.8,58.85 U2.60
  Bottom Layer w0.25: v1(83.625,58.675) 95.125,58.675 99.5,54.3 99.5,43 101.8,40.7 102.8,40.7 103.3,40.2 103.3,36 102.3,35 101.9,35 100.8,36.1 100.8,37.4 99.545,38.655 P6.5
R\E\S\E\T\_OUTPUT: U2.14 U3.2 | length 8.7
  Top Layer w0.2: 73.1,52.3 74.35,52.3 U2.14
  Top Layer w0.25: U3.2 66.8,53.5 67.825,52.475 72.925,52.475 73.1,52.3
RESET.FWD: P6.22 U2.35 | length 22.7
  Top Layer w0.25: v1(74.73,43.93) 75.161,43.5 82.1,43.5 83.2,44.6 U2.35
  Bottom Layer w0.25: v1(74.73,43.93) 74.73,43.77 75.4,43.1 75.4,38.7 76.1,38 78.01,38 P6.22 P6.22@79.225,37.275
RESET.HORZ: P6.24 U2.36 | length 23.7
  Top Layer w0.25: v1(74.2,43.4) 74.5,43.1 82.266,43.1 83.7,44.534 U2.36
  Bottom Layer w0.25: v1(74.2,43.4) 74.2,41.7 72.5,40 72.5,38.6 73.1,38 75.1,38 76.315,36.785 P6.24
RESET.VERT: P6.23 U2.18 | length 16.5
  Top Layer w0.25: U2.18 75.25,50.35 v1(76.5,51.6)
  Bottom Layer w0.25: v1(76.5,51.6) 74.7,49.8 74.7,45.3 76.7,43.3 76.7,39.34 P6.23
TCK: P1.4 R2.1 U2.5 | length 26.2
  Top Layer w0.25: P1.4@57.769,46.45 P1.4 58.456,46.431 58.862,46.025 59.338,46.025 59.513,46.2 60.95,46.2 R2.1 ; R2.1@61.2,46.45 R2.1 ; v1(65.5,45.8) 64.4,46.9 R2.1 ; v1(71.247,56.834) 71.263,56.85 U2.5
  Bottom Layer w0.25: v1(65.5,45.8) 65.5,46.2 65.5,51.5 70.834,56.834 v1(71.247,56.834)
TDI: P1.8 R3.1 U2.2 | length 27.3
  Top Layer w0.25: P1.8 59.669,43.894 R3.1 59.675,44.875 59.9,45.1 v1(60.3,45.1) ; v1(72.07,58.47) 72.189,58.35 U2.2
  Bottom Layer w0.25: v1(60.3,45.1) 63.3,45.1 63.9,45.7 63.9,52.497 69.917,58.514 70.17,58.514 72.025,58.514 v1(72.07,58.47)
TDO: P1.6 R4.1 U2.1 | length 27.2
  Top Layer w0.25: P1.6 57.812,45.1 58.871,45.1 59.334,45.1 59.909,45.675 60.062,45.675 60.254,45.675 60.725,45.675 61.25,45.15 R4.1 61.588,45.162 62.762,45.162 63.1,45.5 v1(63.1,45.9) ; v1(72.6,59) 72.75,58.85 U2.1
  Bottom Layer w0.25: v1(63.1,45.9) 63.1,52.663 69.482,59.045 72.555,59.045 v1(72.6,59)
TMS: P1.2 R1.1 U2.3 | length 30.3
  Top Layer w0.25: P1.2 R1.1 59.6,47.1 v1(59.1,46.6) ; v1(71.539,57.939) 71.629,57.85 U2.3
  Bottom Layer w0.25: v1(59.1,46.6) 59.1,44.862 59.662,44.3 60.062,43.9 63.066,43.9 64.7,45.534 64.7,52 65.5,52.8 70.684,57.984 71.495,57.984 v1(71.539,57.939)
pads on no net: P1.7 P4. P5. U2.7 U2.11 U2.13 U2.15 U2.17 U2.31 U2.44 U2.45 U2.46 U2.47 U2.48 U2.49 U2.53 U2.62 U2.63 U2.64 U2.65 U2.68 U2.69 U2.70 U2.71 U2.72 U2.73 U2.74 U2.75 U2.76 U4.5 U5.6 U5.7 U5.8 U5.9 U5.11 Y1.3 Y1.4
copper on no net:
  other v2: 54.9,29.7 53.7,30 56.1,30 52.8,30.9 57,30.9 52.5,32.1 57.3,32.1 52.8,33.3 57,33.3 53.7,34.2 56.1,34.2 54.9,34.5 92.9,44.7 91.7,45 94.1,45 90.8,45.9 95,45.9 90.5,47.1 95.3,47.1 90.8,48.3 95,48.3 91.7,49.2 94.1,49.2 92.9,49.5 54.9,59.7 92.9,59.7 53.7,60 56.1,60 91.7,60 94.1,60 52.8,60.9 57,60.9 90.8,60.9 95,60.9 52.5,62.1 57.3,62.1 90.5,62.1 95.3,62.1 52.8,63.3 57,63.3 90.8,63.3 95,63.3 53.7,64.2 56.1,64.2 91.7,64.2 94.1,64.2 54.9,64.5 92.9,64.5

## Polygon pours and split planes (outlines as drawn)
CAN_POWER on Top Layer "Top Layer-No Net" (solid, pour order 1000): 108.7,48.2 108.9,48.4 108.9,49.6 108.9,49.9 107.7,51.1 107.6,51.2 107.6,52.8 105.9,52.8 104.2,54.5 104,54.7 104,57.3 103.4,57.3 103.3,57.2 103.2,57.1 103.2,54.5 103.2,53.8 103.7,53.3 103.7,50.6 103.7,50.3 104.3,49.7 104.4,49.6 105.5,49.6 105.9,49.6 107.3,48.2 108.7,48.2
NetD1_1 on Top Layer "Top Layer-No Net" (solid, pour order 1001): 101.9,55.8 100.1,55.8 98.9,54.6 98.9,50.7 97,50.7 97,54.7 97,54.8 99.6,57.4 101.5,57.4 101.7,57.4 101.8,57.3 102,57.1 102,55.9 101.9,55.8
GND on Top Layer "Top Layer-No Net" (solid, pour order 1002): 105.7,53.8 106.2,54.3 106.2,56 106.2,57.3 105.9,57.6 99.6,57.6 99.3,57.6 97.9,56.2 96.5,57.6 96.5,60.6 96.5,61.5 97.5,62.5 97.525,62.475 99.225,62.475 99.325,62.475 99.7,62.1 101.3,60.5 101.3,60 101.3,59.9 101.7,59.5 109.2,59.5 109.3,59.5 110,58.8 110,53.7 108.9,52.6 108.5,53 106.5,53 106.2,53 105.7,53.5 105.7,53.8
NetC17_1 on Top Layer "Top Layer-No Net" (solid, pour order 1003): 101.1,48.6 103.2,50.4 103.2,53.6 103,53.8 103,56.1 102.7,55.8 102.7,55.4 102.4,55.1 101.7,55.1 101.4,54.8 101.4,53.8 100.6,53 100.6,50.8 97.9,49.2 97.9,48.4 99.1,48.4
+3.3 on Top Layer "Top Layer-No Net" (solid, pour order 1004): 107.3,42.5 106.2,41.4 102.1,41.4 102.1,47.9 103.6,49.2 104.9,49.2 105.5,48.8 105.5,45.375 107.3,43.575
+3.3 on Power plane (split plane): 102.998,63.8 103.006,63.761 103.028,63.728 104.528,62.228 104.561,62.206 104.6,62.198 110.39,62.198 110.39,29.129 110.349,28.769 110.239,28.455 110.062,28.173 109.827,27.938 109.545,27.761 109.231,27.651 108.871,27.61 52.929,27.61 52.569,27.651 52.255,27.761 51.973,27.938 51.738,28.173 51.561,28.455 51.451,28.769 51.41,29.129 51.41,65.071 51.451,65.431 51.561,65.745 51.738,66.027 51.973,66.262 52.255,66.439 52.569,66.549 52.929,66.59 102.998,66.59
no net on Power plane (split plane): 109.231,66.549 109.545,66.439 109.827,66.262 110.062,66.027 110.239,65.745 110.349,65.431 110.39,65.071 110.39,62.402 104.642,62.402 103.202,63.842 103.202,66.59 108.871,66.59
GND on Ground plane (split plane): 109.231,66.549 109.545,66.439 109.827,66.262 110.062,66.027 110.239,65.745 110.349,65.431 110.39,65.071 110.39,29.129 110.349,28.769 110.239,28.455 110.062,28.173 109.827,27.938 109.545,27.761 109.231,27.651 108.871,27.61 52.929,27.61 52.569,27.651 52.255,27.761 51.973,27.938 51.738,28.173 51.561,28.455 51.451,28.769 51.41,29.129 51.41,65.071 51.451,65.431 51.561,65.745 51.738,66.027 51.973,66.262 52.255,66.439 52.569,66.549 52.929,66.59 108.871,66.59

## Other copper
Power plane (plane layer: these items are gaps in the copper):
  lines w0.2: 103.1,67.1 103.1,63.8 104.6,62.3 110.9,62.3

## Silkscreen, mask and mechanical layers (free items; w line width, h text height)
Top Overlay:
  circle w0.45: c58.5,37 r0.224
  circle w0.45: c59.5,37 r0.224
  circle w0.45: c60.5,37 r0.224
  circle w0.45: c58.476,36 r0.224
  circle w0.45: c59.476,35 r0.224
  lines w0.2: 50.9,29.1 50.9,65.1 50.95,65.545 51.098,65.968 51.336,66.347 51.653,66.664 52.032,66.902 52.455,67.05 52.9,67.1 108.9,67.1 109.345,67.05 109.768,66.902 110.147,66.664 110.464,66.347 110.702,65.968 110.85,65.545 110.9,65.1 110.9,29.1 110.85,28.655 110.702,28.232 110.464,27.853 110.147,27.536 109.768,27.298 109.345,27.15 108.9,27.1 52.9,27.1 52.455,27.15 52.032,27.298 51.653,27.536 51.336,27.853 51.098,28.232 50.95,28.655 50.9,29.1 ; 57.6,34.2 61.3,34.2 61.3,37.7 61.1,37.9 57.6,37.9 57.6,37.7 57.6,34.2
  text "Debug" at 85.2,65 h1.2
  text "Serial" at 70.9,64.1 h1.2
  text "Reset" at 59,61.1 h1.2
  text "JTAG" at 51.8,51.4 h1.5
  text "HIGH" at 101,28.954 h1.52 r90
  text "LOW" at 103.8,28.954 h1.52 r90
  text "PWR" at 106.3,28.954 h1.52 r90
  text "GND" at 108.8,28.954 h1.52 r90
Bottom Overlay:
  drawing of 3 lines, arcs and shapes, not listed
  text "2: GND" at 87.5,63.925 h1.2
  text "1: 3.3V" at 107.6,63.6 h1.2
  text "4: DIR V/F" at 87.5,62.07 h1.2
  text "©" at 70.7,61.9 h3 r90
  text "3: 3.3V" at 107.8,61.77 h1.2
  text "Motor Supervisor Board" at 61.7,61.7 h1.5 r90
  text "Version 1.0.0" at 64.6,61.7 h1.5 r90
  text "Douglas Young" at 67.5,61.7 h1.5 r90
  text "6: DIR V/A" at 87.5,60.216 h1.2
  text "5: PWM V/F" at 107.8,59.916 h1.2
  text "2012" at 70.6,59 h1.5 r90
  text "8: DIR H/F" at 87.5,58.362 h1.2
  text "7: PWM V/A" at 107.8,58.062 h1.2
  text "10: DIR H/A" at 88.5,56.5 h1.2
  text "9: PWM H/F" at 107.8,56.207 h1.2
  text "12: DIR F/R" at 88.3,54.6 h1.2
  text "11: PWM H/A" at 108.6,54.3 h1.2
  text "14: DIR F/L" at 88.3,52.799 h1.2
  text "13: PWM F/R" at 108.6,52.499 h1.2
  text "16: FAULT V" at 88.3,50.945 h1.2
  text "15: PWM F/L" at 108.6,50.645 h1.2
  text "18: FAULT H" at 88.3,49.09 h1.2
  text "17: OTW V" at 108.6,48.79 h1.2
  text "20: FAULT F" at 88.3,47.236 h1.2
  text "19: OTW H" at 108.6,46.936 h1.2
  text "22: RESET V" at 88.3,45.382 h1.2
  text "21: OTW F" at 108.6,45.082 h1.2
  text "24: RESET H" at 88.3,43.527 h1.2
  text "23: RESET F" at 108.6,43.227 h1.2
  text "26: GND" at 88.3,41.627 h1.2
  text "JTAG" at 52.7,41.6 h2 r270
  text "25: GND" at 108.6,41.327 h1.2
  text "CAN" at 107.7,29 h3

## Text inside footprints (layer, text, board x,y; h text height)
P1: Top Overlay "1" at 55.35,48.425 h1 r90; Top Overlay "2" at 58.225,48.425 h1 r90; Top Overlay "9" at 55.35,41.258 h1 r90; Top Overlay "10" at 56.9,40.7 h1 r90
P4: Bottom Overlay "JST  PA" at 88.75,26.55 h2.5 r180
P5: Bottom Overlay "JST  PA" at 77.4,26.55 h2.5 r180
P6: Top Overlay "26" at 72.2,37 h1.27 r180; Top Overlay "25" at 74.1,42.4 h1.27 r180; Top Overlay "1" at 107.165,39.833 h1.27 r180; Top Overlay "2" at 107.5,37.3 h1.27 r180